# EAGLE board lm2576_pwr_supp (EAGLE 6.6.0)
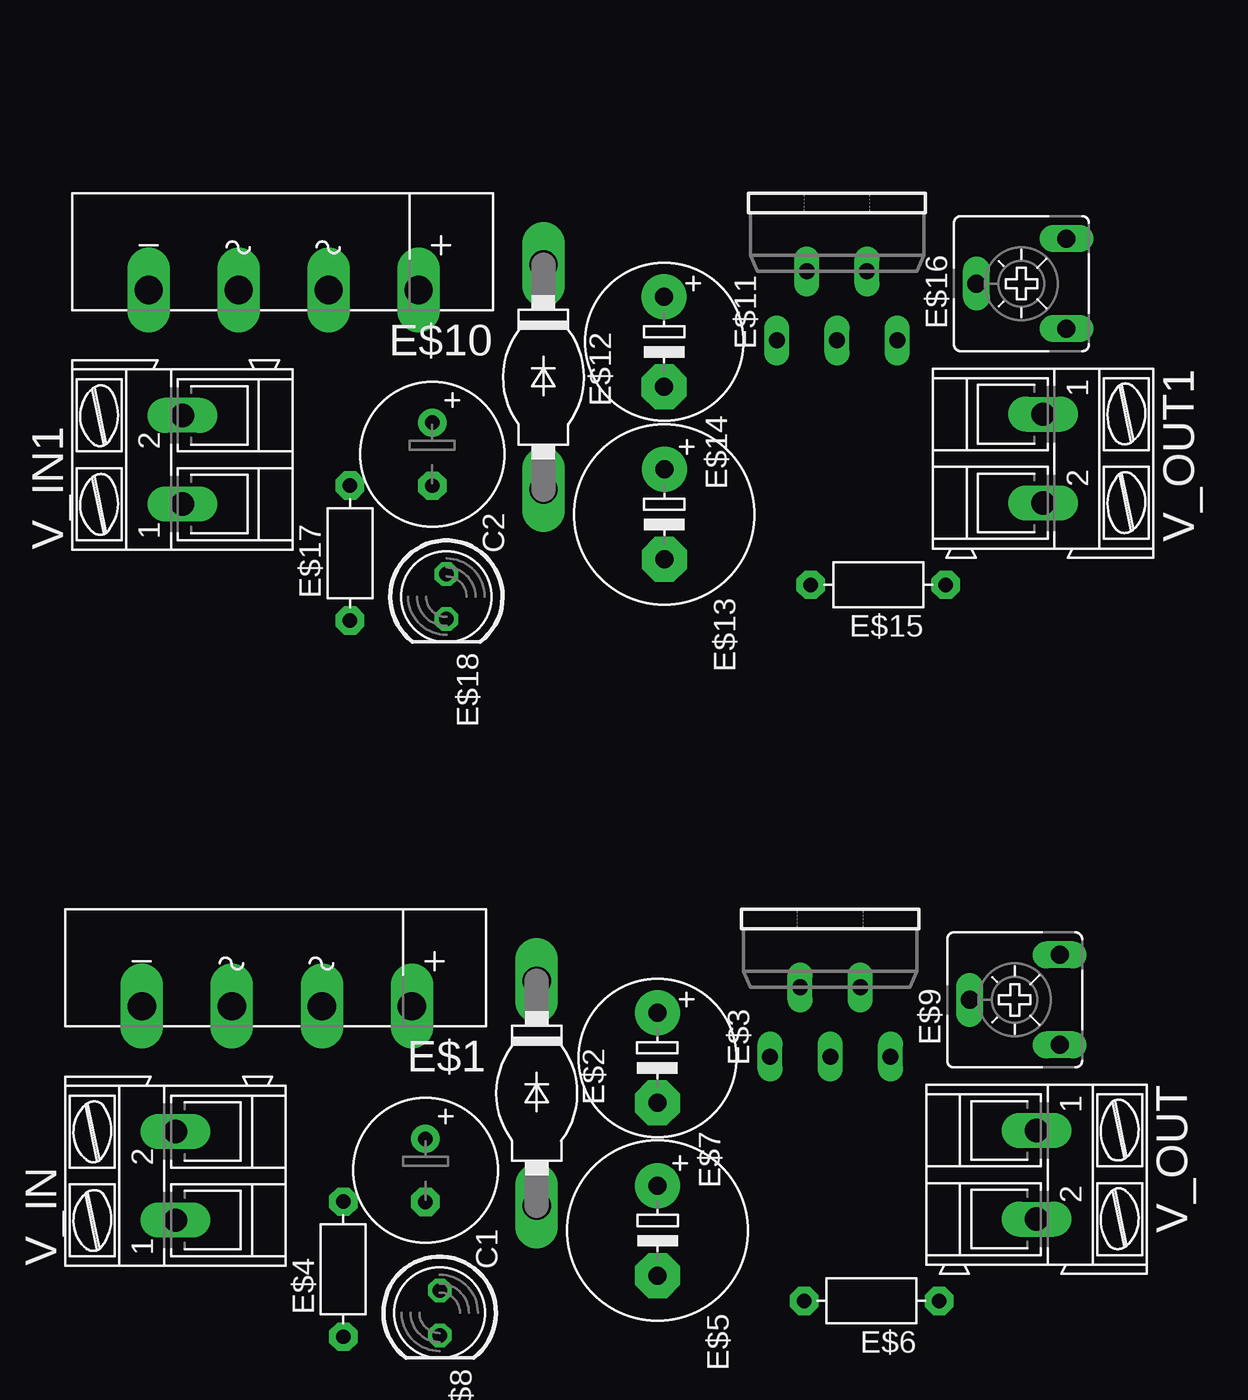
[diagram p0: board, top side]
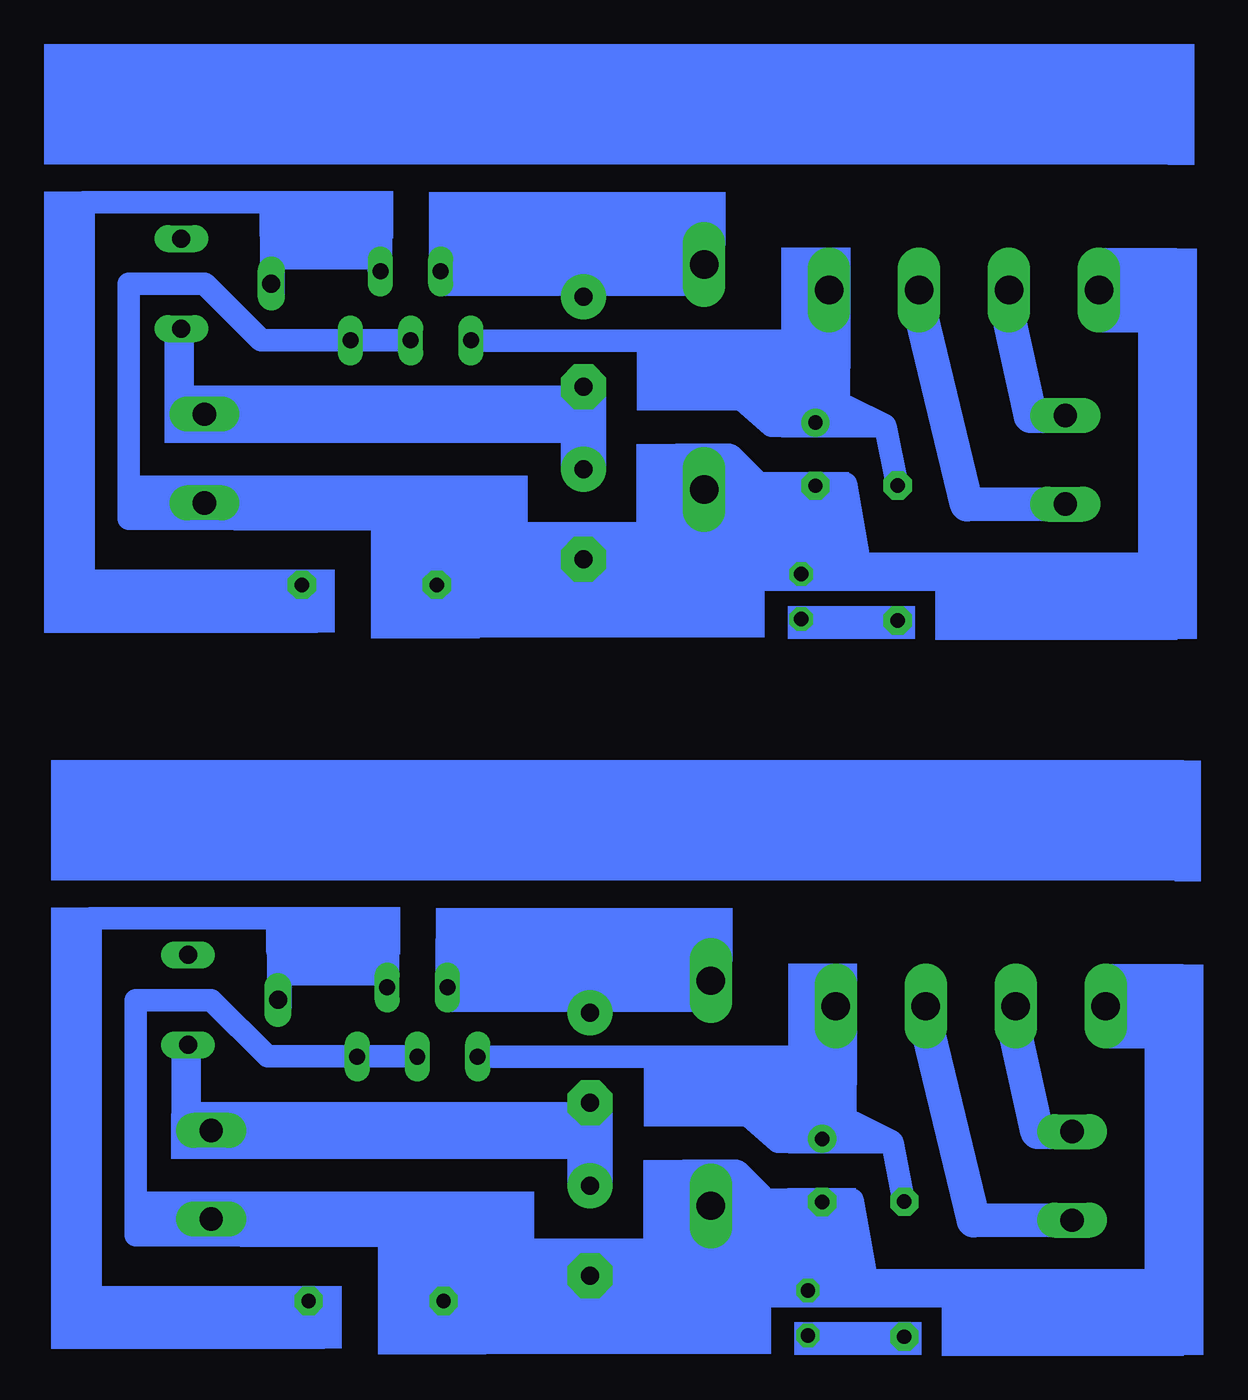
[diagram p1: board, bottom side, seen from below]

No outline drawn. Coordinates in mm, seen from the top.
Copper layers (1*16): Top 0.035mm / dielectric 1.5mm / Bottom 0.035mm
Design rules "default": minimum track width 10mil, minimum drill 24mil, track to track 8mil, track to pad 8mil, pad to pad 8mil, via to via 8mil, smd to smd 8mil, copper to edge 40mil, drill to drill 8mil, minimum pad ring 10mil, minimum via ring 8mil, stop-mask expansion 4mil, vias tented up to drill 0mil, thermal gap 10mil

## Footprints (pad centres in the part's own frame; a part is rotated, then mirrored left to right if it is on the bottom)
E3,5-8 = drill 0.813 pad 1.6: + -1.778,0 | drill 0.813 pad 1.6 octagon: - 1.778,0
KBU = drill 1.6 long: + -7.62,2.54; - 7.62,2.54; AC1 -2.54,2.54; AC2 2.54,2.54
SOD83-12 = drill 1.6 long: A 6.35,0; C -6.35,0
TO220-51 = drill 0.9 long: 1 -3.4,-8.4; 2 -1.7,-4.5; 3 0,-8.4; 4 1.7,-4.5; 5 3.4,-8.4
R-7,5 = drill 0.813 pad 1.6 octagon: 1 -3.81,0; 2 3.81,0
E5-10,5 = drill 1.016 pad 2.54: + -2.54,0 | drill 1.016 pad 2.54 octagon: - 2.54,0
E5-8,5 = drill 1.016 pad 2.54: + -2.54,0 | drill 1.016 pad 2.54 octagon: - 2.54,0
LED5MM = drill 0.813 octagon: A -1.27,0; K 1.27,0
CA6V = drill 1.016 long: A -2.54,-2.54; E 2.54,-2.54; S 0,2.54
AK300/2 = drill 1.321 long: 1 -2.515,0; 2 2.489,0

## Placement (x,y rotation side)
C1  100uF  [E3,5-8]  22.04,10.72 270 top
C2  100uF  [E3,5-8]  22.42,51.13 270 top
E$1  [KBU]  13.65,22.52 180 top
E$2  [SOD83-12]  28.32,15.07 270 top
E$3  [TO220-51]  44.89,25.54 0 top
E$4  [R-7,5]  17.4,5.14 90 top
E$5  [E5-10,5]  35.14,7.32 270 top
E$6  [R-7,5]  47.22,3.35 180 top
E$7  [E5-8,5]  35.13,17.06 270 top
E$8  [LED5MM]  22.84,2.68 270 top
E$9  [CA6V]  55.3,20.34 90 top
E$10  [KBU]  14.03,62.93 180 top
E$11  [TO220-51]  45.27,65.95 0 top
E$12  [SOD83-12]  28.7,55.48 270 top
E$13  [E5-10,5]  35.52,47.73 270 top
E$14  [E5-8,5]  35.51,57.47 270 top
E$15  [R-7,5]  47.6,43.76 180 top
E$16  [CA6V]  55.68,60.75 90 top
E$17  [R-7,5]  17.78,45.55 90 top
E$18  [LED5MM]  23.22,43.09 270 top
V_IN  [AK300/2]  7.93,10.42 90 top
V_IN1  [AK300/2]  8.31,50.83 90 top
V_OUT  [AK300/2]  56.53,10.46 270 top
V_OUT1  [AK300/2]  56.91,50.87 270 top

## Library data of the parts
C1 C2 E$5 E$7 E$13 E$14 = resistor
E$1 E$10 = rectifier
E$2 E$12 = diode
E$3 E$11 = linear
E$4 E$6 E$15 E$17 = discrete
E$8 E$18 = led
E$9 E$16 = pot
V_IN V_IN1 V_OUT V_OUT1 = con-ptr500

## Tracks (layer width: path | path; a pad name or v marks a point on that pad's centre or on a via)
S$1
  Bottom 1.93: 7.9,12.87 9.88,12.87 11.15,18.62
S$2
  Bottom 1.93: 7.9,7.88 13.48,7.89 16.05,18.55
S$3
  Bottom 1.27: 41.5,17.13 21.3,17.13 21.3,20.15
S$4
  Bottom 2.184: 6.03,19.97 2.74,19.97 2.74,4.08 41,4.08
S$5
  Bottom 1.676: 53.07,12.94 57.95,12.94 57.95,17.67
S$6
  Bottom 1.676: 35.09,14.61 35.09,12.92 | 35.09,9.87 35.09,12.92 | 35.09,12.92 52.91,12.96
S$7
  Bottom 1.422: 46.6,21.05 46.6,23.04 52.7,23.04 52.7,19.86
S$8
  Bottom 1.676: 52.99,7.96 41.27,7.96 41.27,4.15
S$9
  Bottom 1.27: 52.8,23.13 52.8,24.94 63.34,24.94 63.34,3.32 51.06,3.32
S$10
  Bottom 1.27: 44.92,17.15 53.34,17.15 56.52,20.33 60.8,20.33 60.8,7.07 41.25,7.07
S$11
  Bottom 1.27: 17.42,8.93 18.08,12.31 21.69,12.31
S$12
  Bottom 1.27: 18.12,12.36 20.28,13.43 21.05,13.43
S$13
  Bottom 1.27: 21.36,12.33 24.53,12.33 26.11,13.72
S$14
  Bottom 1.27: 29.36,10.67 26.83,10.67 25.44,9.28
S$15
  Bottom 1.27: 19.58,4.81 20.33,9.05 19.8,6.07
S$16
  Bottom 1.93: 8.28,53.28 10.26,53.28 11.53,59.03
S$17
  Bottom 1.93: 8.28,48.29 13.86,48.3 16.43,58.96
S$18
  Bottom 1.27: 41.88,57.54 21.68,57.54 21.68,60.56
S$19
  Bottom 2.184: 6.41,60.38 3.12,60.38 3.12,44.49 41.38,44.49
S$20
  Bottom 1.676: 35.47,55.02 35.47,53.33 | 35.47,50.28 35.47,53.33 | 35.47,53.33 53.29,53.37
S$21
  Bottom 1.422: 46.98,61.46 46.98,63.45 53.08,63.45 53.08,60.27
S$22
  Bottom 1.676: 53.45,53.35 58.33,53.35 58.33,58.08
S$23
  Bottom 1.676: 53.37,48.37 41.65,48.37 41.65,44.56
S$24
  Bottom 1.27: 45.3,57.56 53.72,57.56 56.9,60.74 61.18,60.74 61.18,47.48 41.63,47.48
S$25
  Bottom 1.27: 53.18,63.54 53.18,65.35 63.72,65.35 63.72,43.73 51.44,43.73
S$26
  Bottom 1.27: 17.8,49.34 18.46,52.72 22.07,52.72
S$27
  Bottom 1.27: 18.5,52.77 20.66,53.84 21.43,53.84
S$28
  Bottom 1.27: 21.74,52.74 24.91,52.74 26.49,54.13
S$29
  Bottom 1.27: 29.74,51.08 27.21,51.08 25.82,49.69
S$30
  Bottom 1.27: 19.96,45.22 20.71,49.46 20.18,46.48
(copper drawn outside any net)
  shapes: Bottom area x80